# Altium PCB lab2_kulikov_buck.PcbDoc
Units mm, origin at the board's own origin, x right, y up, seen from the top; angles counter-clockwise.
Board outline 44.1 x 50 mm, 2 copper layers (Top Layer, Bottom Layer), stack 1.57 mm thick; 27 components, 17 nets, 93 pads, 5 vias.
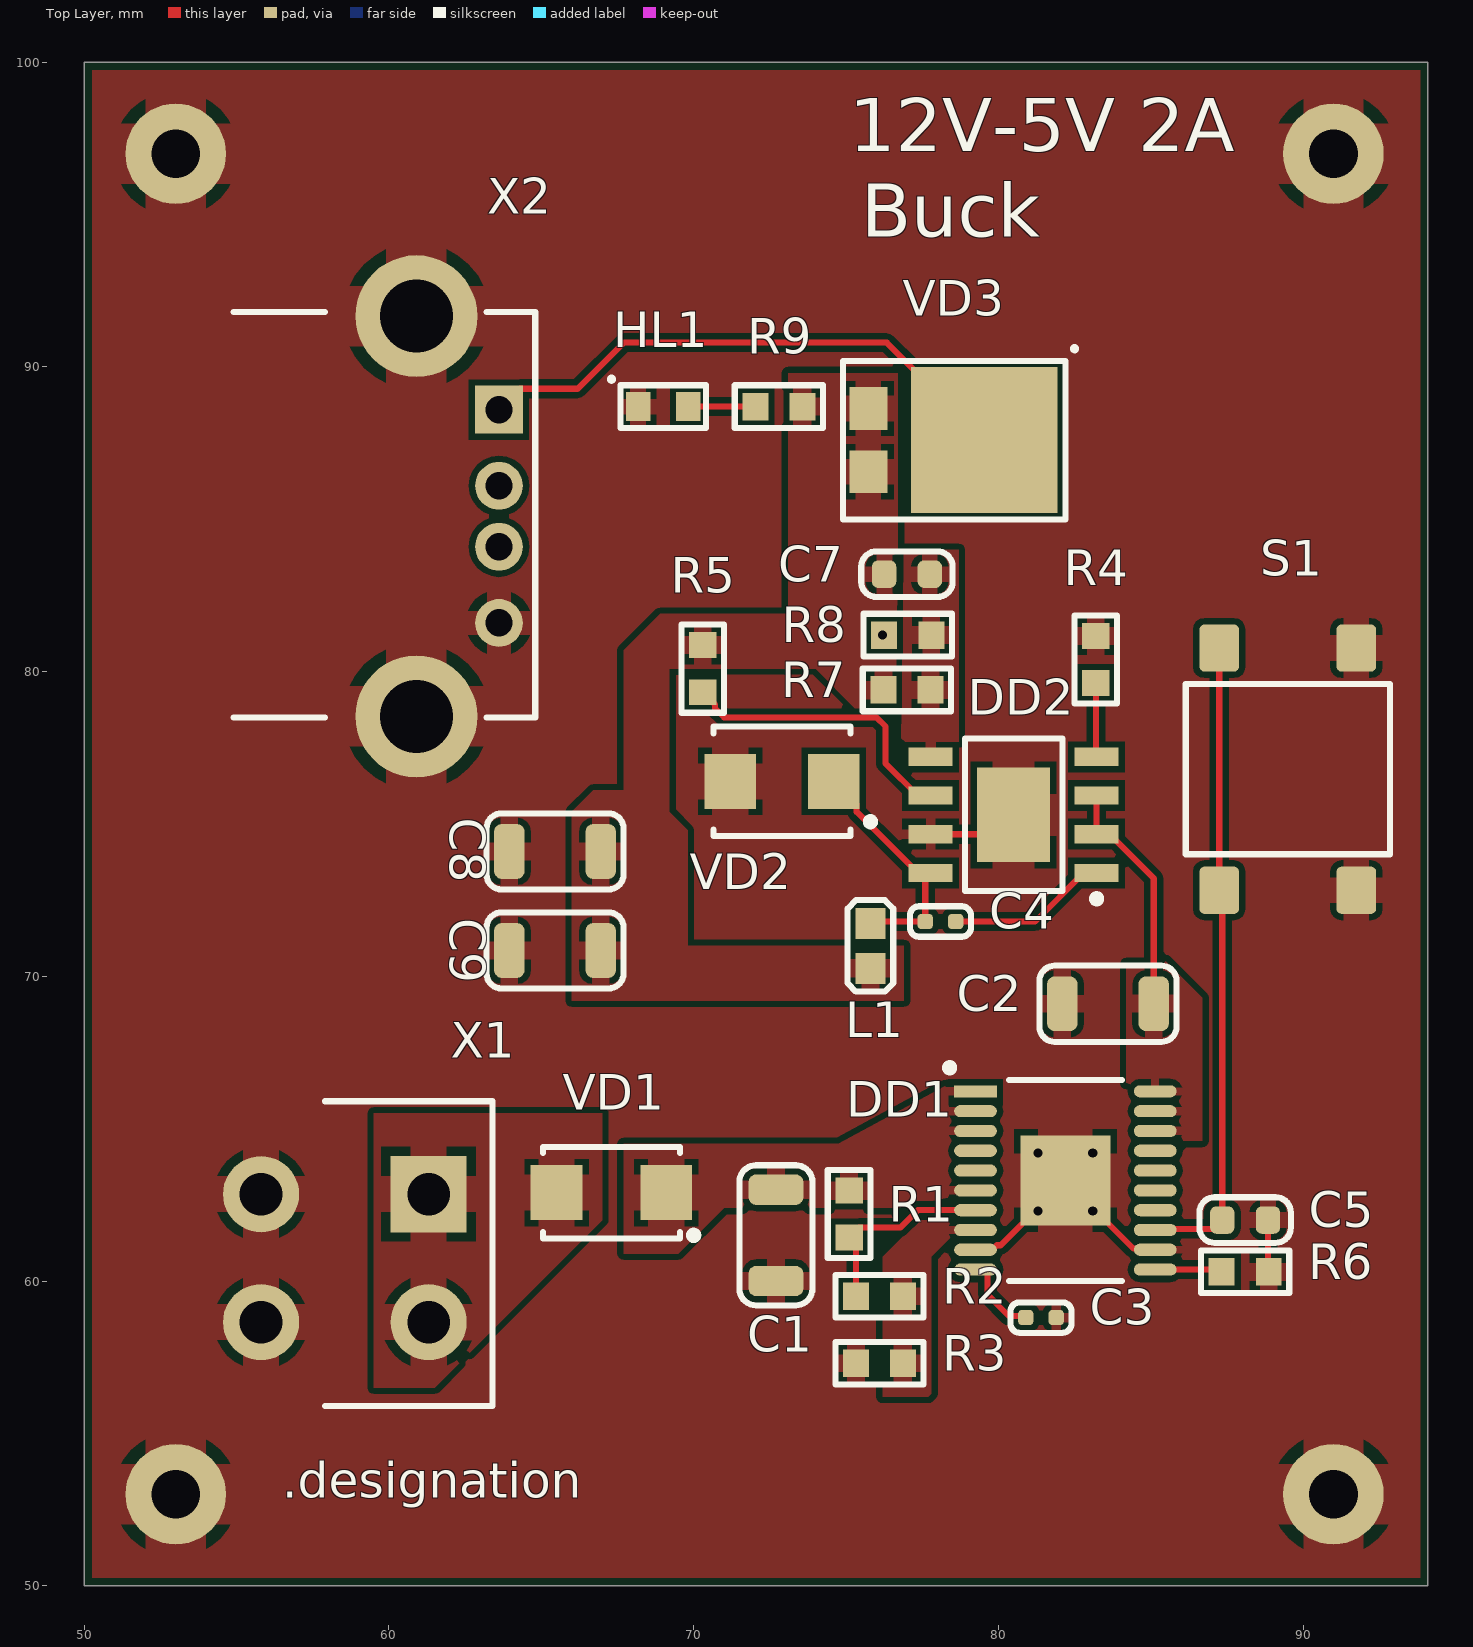
[diagram p0: Top Layer view]
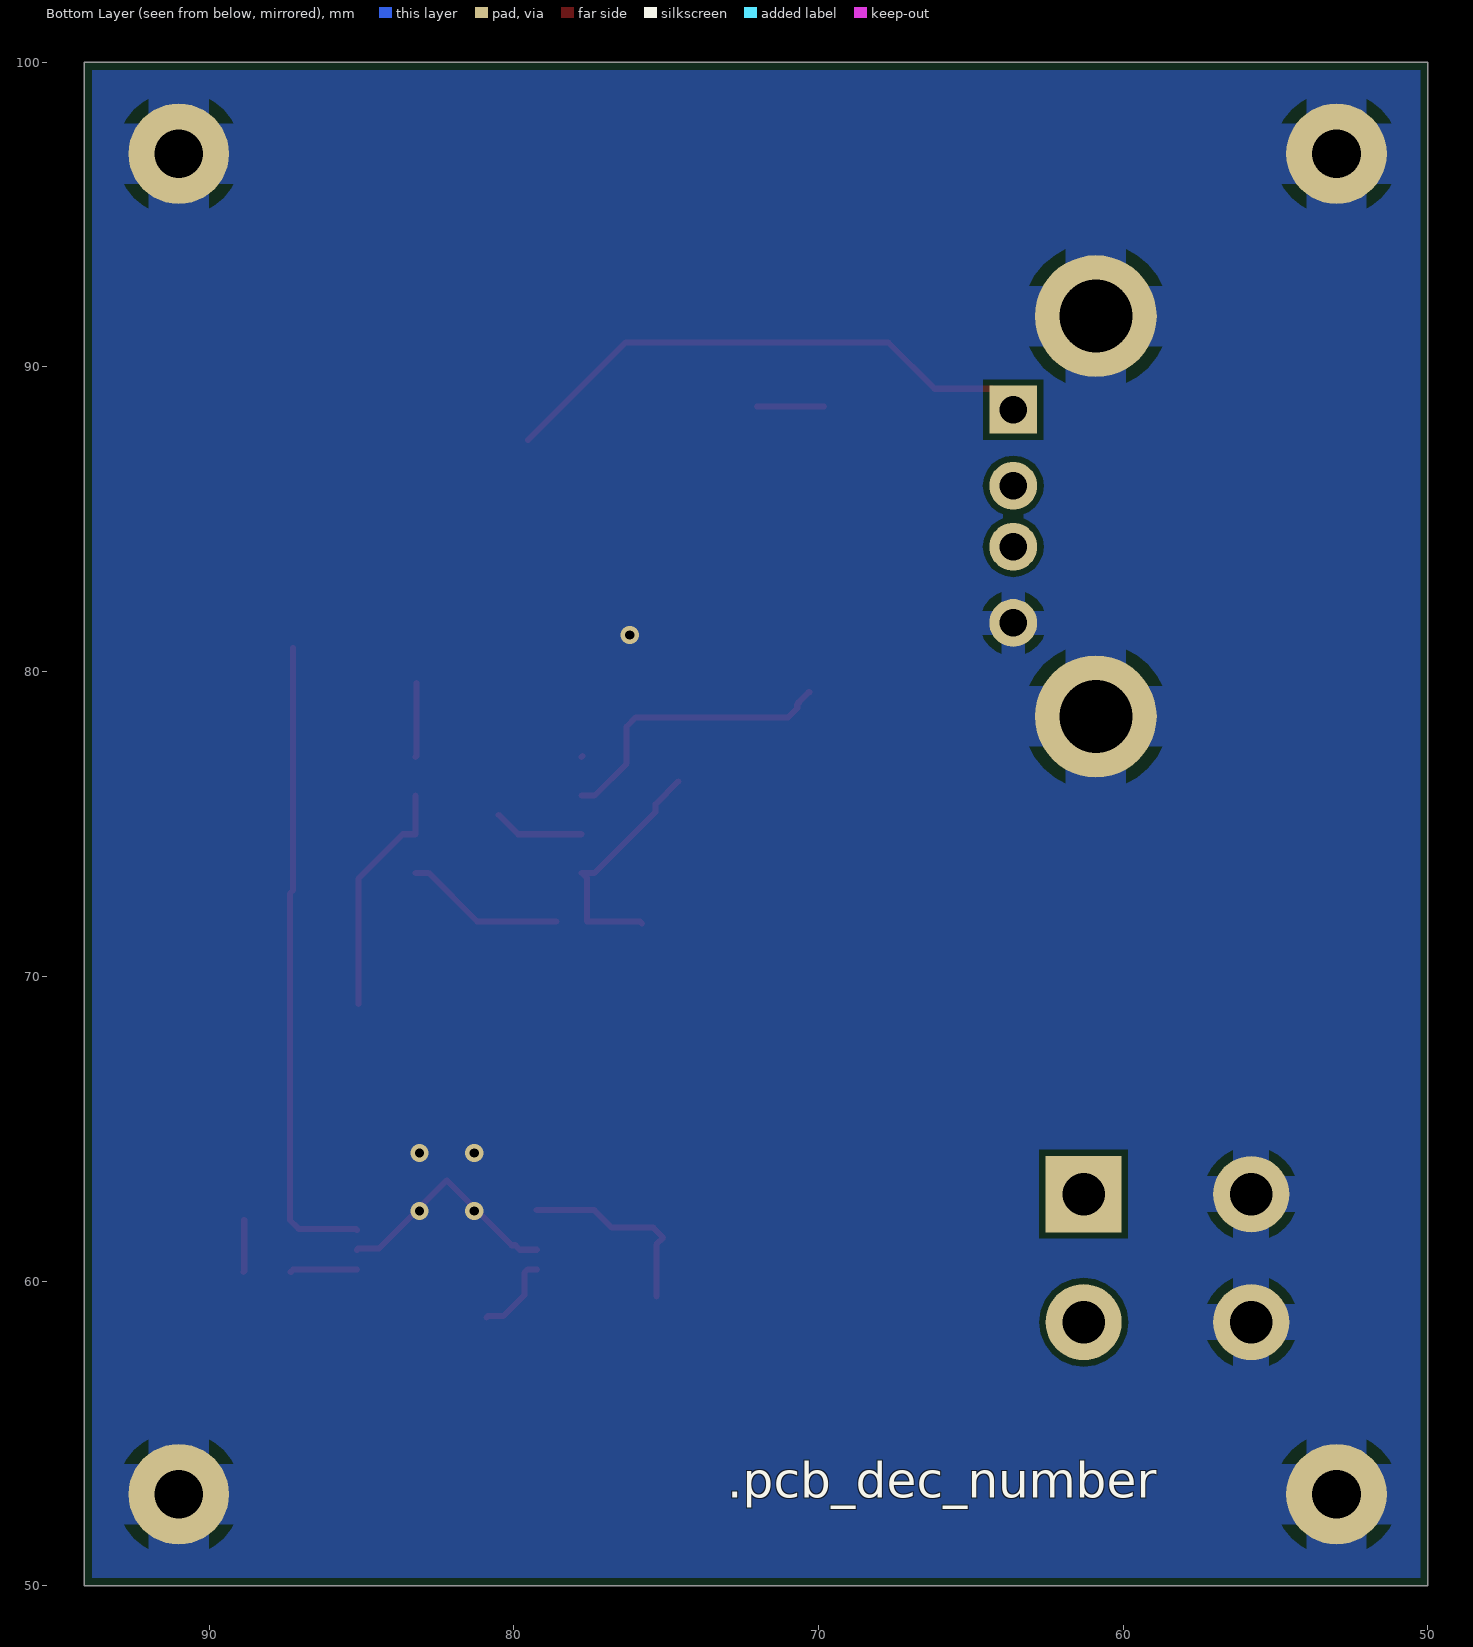
[diagram p1: Bottom Layer view, seen from below]
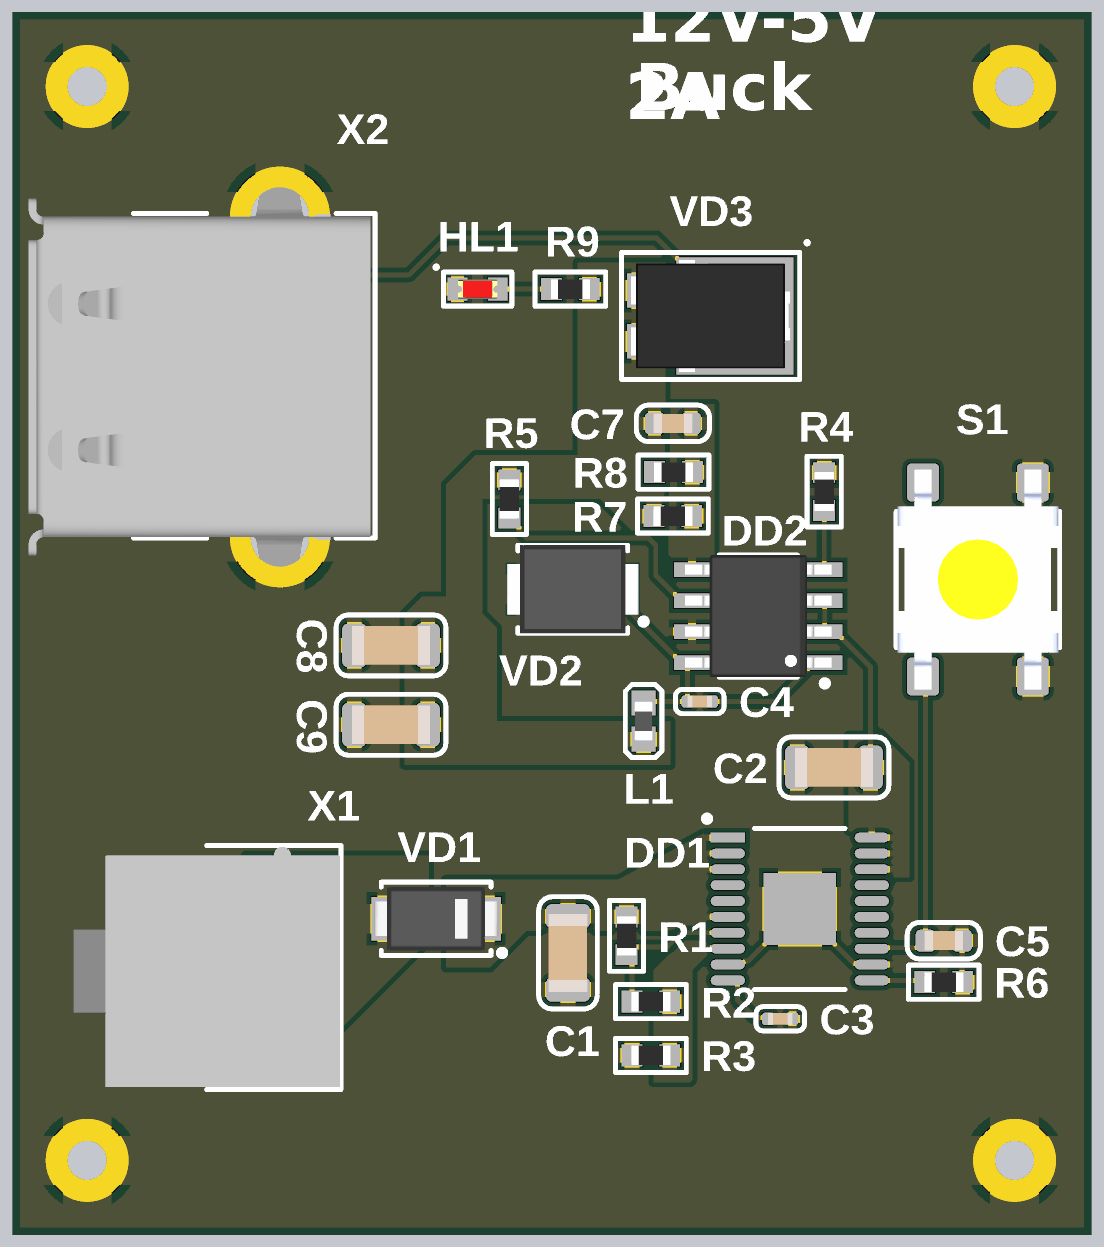
[diagram p2: 3D render of the assembled board from above, using the file's embedded part models]

## Layer stack, top to bottom
Top Solder: solder mask 0.0102, Solder Resist, Dk 3.5
Top Layer: signal copper 0.035
Core 1: core 1.5, FR4, Dk 4.6
Bottom Layer: signal copper 0.035
Bottom Solder: solder mask 0.0102, Solder Resist, Dk 3.5

## Board outline
50,50 50,100 94.1,100 94.1,50

## Design rules (kind name [scope] priority, off if disabled: settings)
AcuteAngle min_acute_angle [OnCopper] p1: minimum=3.50000000000000E+0001 checktracksonly=FALSE // Минимальный угол между примитивами топологии
BoardOutlineClearance board_outline_clearance_std [NOT (OnLayer('Bottom Overlay') OR OnLayer('Top Overlay'))] p1: gap=0.25 ignorepadtopadclearanceinfootprint=FALSE except(0: Arc-SplitContinuation Track-SplitContinuation SMDPad-SplitContinuation THPad-SplitContinuation Via-SplitContinuation Fill-SplitContinuation Poly-SplitContinuation Region-SplitContinuation Text-SplitContinuation) // Отступ элементов топологии от края фрезеруемой печатной платы
Clearance "Stitching GND" [IsStitchingVia and InNet('GND') vs (IsVia and (Not IsStitchingVia)) Or IsPad] p1: gap=0.127 ignorepadtopadclearanceinfootprint=FALSE
Clearance clearance_outer_35um_std [OnTopLayer OR OnBottomLayer] p2: gap=0.2 ignorepadtopadclearanceinfootprint=TRUE except(0.25: Arc-Hole Track-Hole SMDPad-Hole THPad-Hole Via-Hole Fill-Hole Poly-Hole Region-Hole Text-Hole) // Зазоры на внешних слоях
Clearance clearance_inner_35um_std [NOT (OnTopLayer Or OnBottomLayer)] p3: gap=0.2 ignorepadtopadclearanceinfootprint=FALSE except(0.25: Arc-Hole Track-Hole SMDPad-Hole THPad-Hole Via-Hole Fill-Hole Poly-Hole Region-Hole Text-Hole) // Зазоры на внутренних слоях
ComponentClearance [All] p1: gap=0 collisioncheckmode=3 verticalgap=0 showdistances=FALSE
DiffPairsRouting diff_pairs_routing [All] p1: maxlimit=0.127 minlimit=0.127 mostfreqgap=0.127 toplayer_minwidth=0.143 toplayer_maxwidth=0.143 toplayer_prefwidth=0.143 bottomlayer_minwidth=0.143 bottomlayer_maxwidth=0.143 bottomlayer_prefwidth=0.143 impedanceprofiledriven=TRUE impedanceprofileid={FD46899E-B5A2-4EF5-A302-5D2DB6A51F35} maxuncoupledlength=12.7 // Правила трассировки дифференциальных пар
HoleSize min_hole_size_std [IsPad] p1: absolutevalues=TRUE maxlimit=5.9 minlimit=0.6 maxpercent=80.000 minpercent=20.000 // Диаметр межслойного переходного отверстия
HoleSize min_hole_size_via_std [IsVia] p2: absolutevalues=TRUE maxlimit=5.9 minlimit=0.3 maxpercent=80.000 minpercent=20.000 // Минимальный диаметр монтажного отверстия
HoleToHoleClearance hole_to_hole_clearance_std [All] p1: gap=0.2 allowstackedmicrovias=FALSE // Минимальное расстояние между краями двух отверстий
MinimumAnnularRing min_via_ar_std [All] p1: minimumring=0.15 // Поясок площадки переходного отверстия (Annular ring VIA)
MinimumAnnularRing min_pad_ar_std [All] p2: minimumring=0.2 // Поясок монтажной контактной площадки (Annular ring PAD)
MinimumSolderMaskSliver min_solder_mask_bridge_std [All] p1: minsoldermaskwidth=0.15 // Мнимальная ширина масочного мостика
PlaneClearance plane_clearance_35um_std [All] p1: clearance=0.2 // Отступ полигона (для слоя plane) от элементов топологии
PlaneConnect [All] p1: planeconnectstyle=Relief reliefexpansion=0.5 reliefentries=4 reliefconductorwidth=0.2 reliefairgap=0.2
PolygonConnect poly_connect_to_pad<=0.3 [(AsMM(PadXSize_AllLayers)<=0.301) or (AsMM(PadYSize_AllLayers)<=0.301)] p1: thpad.connectstyle=Relief thpad.reliefconductorwidth=0.2 thpad.reliefentries=4 thpad.polygonreliefangle="90 Angle" thpad.airgapwidth=0.2 smdpad.connectstyle=Relief smdpad.reliefconductorwidth=0.2 smdpad.reliefentries=4 smdpad.polygonreliefangle="90 Angle" smdpad.airgapwidth=0.2 via.connectstyle=Direct via.reliefconductorwidth=0.254 via.reliefentries=4 via.polygonreliefangle="90 Angle" via.airgapwidth=0.254 // Правила подключения полигонов для падов от 0,3мм и меньше
PolygonConnect poly_connect_to_pad<=0.4 [(AsMM(PadXSize_AllLayers)<=0.401) or (AsMM(PadYSize_AllLayers)<=0.401)] p2: thpad.connectstyle=Relief thpad.reliefconductorwidth=0.26 thpad.reliefentries=4 thpad.polygonreliefangle="90 Angle" thpad.airgapwidth=0.2 smdpad.connectstyle=Relief smdpad.reliefconductorwidth=0.26 smdpad.reliefentries=4 smdpad.polygonreliefangle="90 Angle" smdpad.airgapwidth=0.2 via.connectstyle=Direct via.reliefconductorwidth=0.254 via.reliefentries=4 via.polygonreliefangle="90 Angle" via.airgapwidth=0.254 // Правила подключения полигонов для падов от 0,4 и меньше
PolygonConnect poly_connect_to_pad<=0.6 [(AsMM(PadXSize_AllLayers)<=0.601) or (AsMM(PadYSize_AllLayers)<=0.601)] p3: thpad.connectstyle=Relief thpad.reliefconductorwidth=0.33 thpad.reliefentries=4 thpad.polygonreliefangle="90 Angle" thpad.airgapwidth=0.2 smdpad.connectstyle=Relief smdpad.reliefconductorwidth=0.33 smdpad.reliefentries=4 smdpad.polygonreliefangle="90 Angle" smdpad.airgapwidth=0.2 via.connectstyle=Direct via.reliefconductorwidth=0.254 via.reliefentries=4 via.polygonreliefangle="90 Angle" via.airgapwidth=0.254 // Правила подключения полигонов для падов от 0,6мм и меньше
PolygonConnect poly_connect_to_pad<=0.7 [(AsMM(PadXSize_AllLayers)<=0.701) or (AsMM(PadYSize_AllLayers)<=0.701)] p4: thpad.connectstyle=Relief thpad.reliefconductorwidth=0.46 thpad.reliefentries=4 thpad.polygonreliefangle="90 Angle" thpad.airgapwidth=0.2 smdpad.connectstyle=Relief smdpad.reliefconductorwidth=0.46 smdpad.reliefentries=4 smdpad.polygonreliefangle="90 Angle" smdpad.airgapwidth=0.2 via.connectstyle=Direct via.reliefconductorwidth=0.254 via.reliefentries=4 via.polygonreliefangle="90 Angle" via.airgapwidth=0.254 // Правила подключения полигонов для падов от 0,7мм и меньше
PolygonConnect poly_connect_to_pad<=0.8 [(AsMM(PadXSize_AllLayers)<=0.8)or(AsMM(PadYSize_AllLayers)<=0.8)] p5: thpad.connectstyle=Relief thpad.reliefconductorwidth=0.53 thpad.reliefentries=4 thpad.polygonreliefangle="90 Angle" thpad.airgapwidth=0.3 smdpad.connectstyle=Relief smdpad.reliefconductorwidth=0.53 smdpad.reliefentries=4 smdpad.polygonreliefangle="90 Angle" smdpad.airgapwidth=0.2 via.connectstyle=Direct via.reliefconductorwidth=0.254 via.reliefentries=4 via.polygonreliefangle="90 Angle" via.airgapwidth=0.254 // Правила подключения полигонов для падов от 0,8мм и меньше
PolygonConnect poly_connect_to_pad<=1 [(AsMM(PadXSize_AllLayers)<=1.01)or(AsMM(PadYSize_AllLayers)<=1.01)] p6: thpad.connectstyle=Relief thpad.reliefconductorwidth=0.6 thpad.reliefentries=4 thpad.polygonreliefangle="90 Angle" thpad.airgapwidth=0.3 smdpad.connectstyle=Relief smdpad.reliefconductorwidth=0.6 smdpad.reliefentries=4 smdpad.polygonreliefangle="90 Angle" smdpad.airgapwidth=0.2 via.connectstyle=Direct via.reliefconductorwidth=0.254 via.reliefentries=4 via.polygonreliefangle="90 Angle" via.airgapwidth=0.254 // Правила подключения полигонов для падов от 1мм и меньше
PolygonConnect poly_connect_to_pad<=1.3 [(AsMM(PadXSize_AllLayers)<=1.31)or(AsMM(PadYSize_AllLayers)<=1.31)] p7: thpad.connectstyle=Relief thpad.reliefconductorwidth=0.66 thpad.reliefentries=4 thpad.polygonreliefangle="90 Angle" thpad.airgapwidth=0.3 smdpad.connectstyle=Relief smdpad.reliefconductorwidth=0.86 smdpad.reliefentries=4 smdpad.polygonreliefangle="90 Angle" smdpad.airgapwidth=0.2 via.connectstyle=Direct via.reliefconductorwidth=0.254 via.reliefentries=4 via.polygonreliefangle="90 Angle" via.airgapwidth=0.254 // Правила подключения полигонов для падов от 1,3мм и меньше
PolygonConnect poly_connect_to_pad<=1.6 [(AsMM(PadXSize_AllLayers)<=1.61)or(AsMM(PadYSize_AllLayers)<=1.61)] p8: thpad.connectstyle=Relief thpad.reliefconductorwidth=0.8 thpad.reliefentries=4 thpad.polygonreliefangle="90 Angle" thpad.airgapwidth=0.3 smdpad.connectstyle=Relief smdpad.reliefconductorwidth=1 smdpad.reliefentries=4 smdpad.polygonreliefangle="90 Angle" smdpad.airgapwidth=0.2 via.connectstyle=Direct via.reliefconductorwidth=0.254 via.reliefentries=4 via.polygonreliefangle="90 Angle" via.airgapwidth=0.254 // Правила подключения полигонов для падов от 1,6мм и меньше
PolygonConnect poly_connect_to_pad<=1.8 [(AsMM(PadXSize_AllLayers)<=1.8)or(AsMM(PadYSize_AllLayers)<=1.8)] p9: thpad.connectstyle=Relief thpad.reliefconductorwidth=1 thpad.reliefentries=4 thpad.polygonreliefangle="90 Angle" thpad.airgapwidth=0.3 smdpad.connectstyle=Relief smdpad.reliefconductorwidth=1.2 smdpad.reliefentries=4 smdpad.polygonreliefangle="90 Angle" smdpad.airgapwidth=0.2 via.connectstyle=Direct via.reliefconductorwidth=0.254 via.reliefentries=4 via.polygonreliefangle="90 Angle" via.airgapwidth=0.254 // Правила подключения полигонов для падов от 1,8мм и меньше
PolygonConnect poly_connect_to_pad<=2 [(AsMM(PadXSize_AllLayers)<=2.01)or(AsMM(PadYSize_AllLayers)<=2.01)] p10: thpad.connectstyle=Relief thpad.reliefconductorwidth=1.1 thpad.reliefentries=4 thpad.polygonreliefangle="90 Angle" thpad.airgapwidth=0.3 smdpad.connectstyle=Relief smdpad.reliefconductorwidth=1.4 smdpad.reliefentries=4 smdpad.polygonreliefangle="90 Angle" smdpad.airgapwidth=0.2 via.connectstyle=Direct via.reliefconductorwidth=0.254 via.reliefentries=4 via.polygonreliefangle="90 Angle" via.airgapwidth=0.254 // Правила подключения полигонов для падов от 2мм и меньше
PolygonConnect poly_connect_to_pad<=2.3 [(AsMM(PadXSize_AllLayers)<=2.31)or(AsMM(PadYSize_AllLayers)<=2.31)] p11: thpad.connectstyle=Relief thpad.reliefconductorwidth=1.2 thpad.reliefentries=4 thpad.polygonreliefangle="90 Angle" thpad.airgapwidth=0.3 smdpad.connectstyle=Relief smdpad.reliefconductorwidth=1.4 smdpad.reliefentries=4 smdpad.polygonreliefangle="90 Angle" smdpad.airgapwidth=0.2 via.connectstyle=Direct via.reliefconductorwidth=0.254 via.reliefentries=4 via.polygonreliefangle="90 Angle" via.airgapwidth=0.254 // Правила подключения полигонов для падов от 2,3мм и меньше
PolygonConnect poly_connect_to_pad<=2.5 [(AsMM(PadXSize_AllLayers)<=2.51)or(AsMM(PadYSize_AllLayers)<=2.51)] p12: thpad.connectstyle=Relief thpad.reliefconductorwidth=1.2 thpad.reliefentries=4 thpad.polygonreliefangle="90 Angle" thpad.airgapwidth=0.3 smdpad.connectstyle=Relief smdpad.reliefconductorwidth=1.4 smdpad.reliefentries=4 smdpad.polygonreliefangle="90 Angle" smdpad.airgapwidth=0.2 via.connectstyle=Direct via.reliefconductorwidth=0.254 via.reliefentries=4 via.polygonreliefangle="90 Angle" via.airgapwidth=0.254 // Правила подключения полигонов для падов от 2,5мм и меньше
PolygonConnect poly_connect_to_pad<=2.7 [(AsMM(PadXSize_AllLayers)<=2.71)or(AsMM(PadYSize_AllLayers)<=2.71)] p13: thpad.connectstyle=Relief thpad.reliefconductorwidth=1.4 thpad.reliefentries=4 thpad.polygonreliefangle="90 Angle" thpad.airgapwidth=0.3 smdpad.connectstyle=Relief smdpad.reliefconductorwidth=1.6 smdpad.reliefentries=4 smdpad.polygonreliefangle="90 Angle" smdpad.airgapwidth=0.2 via.connectstyle=Direct via.reliefconductorwidth=0.254 via.reliefentries=4 via.polygonreliefangle="90 Angle" via.airgapwidth=0.254 // Правила подключения полигонов для падов от 2,7мм и меньше
PolygonConnect poly_connect_to_pad<=3 [(AsMM(PadXSize_AllLayers)<=3.01)or(AsMM(PadYSize_AllLayers)<=3.01)] p14: thpad.connectstyle=Relief thpad.reliefconductorwidth=1.6 thpad.reliefentries=4 thpad.polygonreliefangle="90 Angle" thpad.airgapwidth=0.3 smdpad.connectstyle=Relief smdpad.reliefconductorwidth=1.8 smdpad.reliefentries=4 smdpad.polygonreliefangle="90 Angle" smdpad.airgapwidth=0.2 via.connectstyle=Direct via.reliefconductorwidth=0.254 via.reliefentries=4 via.polygonreliefangle="90 Angle" via.airgapwidth=0.254 // Правила подключения полигонов для падов от 3мм и меньше
PolygonConnect poly_connect_to_pad<=7 [(AsMM(PadXSize_AllLayers)<7.01)or(AsMM(PadYSize_AllLayers)<=7.01)] p15: thpad.connectstyle=Relief thpad.reliefconductorwidth=2 thpad.reliefentries=4 thpad.polygonreliefangle="90 Angle" thpad.airgapwidth=0.4 smdpad.connectstyle=Relief smdpad.reliefconductorwidth=2 smdpad.reliefentries=4 smdpad.polygonreliefangle="90 Angle" smdpad.airgapwidth=0.3 via.connectstyle=Direct via.reliefconductorwidth=0.254 via.reliefentries=4 via.polygonreliefangle="90 Angle" via.airgapwidth=0.254 // Правила подключения полигонов для падов от 7мм и меньше
PolygonConnect poly_connect_to_pad [All] p16: thpad.connectstyle=Relief thpad.reliefconductorwidth=0.25 thpad.reliefentries=4 thpad.polygonreliefangle="90 Angle" thpad.airgapwidth=0.2 smdpad.connectstyle=Relief smdpad.reliefconductorwidth=0.25 smdpad.reliefentries=4 smdpad.polygonreliefangle="90 Angle" smdpad.airgapwidth=0.2 via.connectstyle=Direct via.reliefconductorwidth=0.25 via.reliefentries=4 via.polygonreliefangle="90 Angle" via.airgapwidth=0.2 // Правила подключения полигонов общие
RoomDefinition lab2_kulikov_buck [InComponentClass('lab2_kulikov_buck')] p1: confinementstyle=ConfineIn formatcopy=TRUE lockcomponents=FALSE outline 0,0 50.8,0 50.8,25.4 0,25.4
RoutingCorners [All] p1 off: cornerstyle=45-Degree minsetback=2.5 maxsetback=2.5
RoutingVias [All] p1: holewidth=0.3 width=0.6 viastyle="Through Hole" minholewidth=0.3 minwidth=0.6 maxholewidth=5.9 maxwidth=6.4
SilkToSilkClearance silk_to_silk_clearance_std [All] p1 off: silktosilkclearance=0.15 // Отступ текста шелкографии от других примитивов шелкографии
SilkToSolderMaskClearance silk_to_solder_mask_clearance_std [IsPad] p1 off: minsilkscreentomaskgap=0.15 clearancetoexposedcopper=FALSE // Минимальное расстояние между элементами шелкографии и вскрытой медью
SolderMaskExpansion solder_mask_expansion_std [All] p1: expansion=0.05 // Припуск паяльной масски
UnRoutedNet [All] p1: checkbadconnections=TRUE
Width width_35um_std [All] p1: maxlimit=10 minlimit=0.2 preferedwidth=0.2 checkconnectedcopper=TRUE // Ширина проводников (общая)
19 further rules are at their usual default settings.

## Components (designator, comment, footprint, x,y, rotation, side; value= is the part's Value field where it differs from the comment)
C1 "1 мк" C1206 72.7,61.5 r270 top
C2 "4,7 мк" C1206 83.6,69.1 r180 top
C3 "680" C0402 81.4,58.8 r0 top
C4 "0,1 мк" C0402 78.1,71.8 r180 top
C5 "0,1 мк" C0603 88.1,62 r0 top
C7 "390 п" C0603 77,83.2 r0 top
C8 "100 мк" C1206 65.45,74.1 r180 top
C9 "100 мк" C1206 65.45,70.85 r180 top
DD1 "TPS16630PWPR" HTSSOP-20 82.2,63.3 r0 top
DD2 "LMR16020" SOIC127P600X170_HS-9N 80.5,75.3 r180 top
HL1 "TLMS1000-GS08" HL0603 69,88.7 r0 top
L1 "BLM18KG221SH1D" BLM-2-0603 75.8,71 r270 top
R1 "240 к" R0603 75.1,62.2 r270 top
R2 "12 к" R0603 76.1,59.5 r180 top
R3 "20 к" R0603 76.1,57.3 r0 top
R4 "47 к" R0603 83.2,80.4 r270 top
R5 "100 к" R0603 70.3,80.1 r90 top
R6 "9,1 к" R0603 88.1,60.3 r180 top
R7 "68 к" R0603 77,79.4 r180 top
R8 "12 к" R0603 77.025,81.2 r180 top
R9 "220" R0603 72.8,88.7 r0 top
S1 "B3S-1002" B3S-1002 89.5,76.8 r270 top
VD1 "SL13-E3/5AT" DO-214AC-510X270X229 67.3,62.9 r180 top
VD2 "SS36-E3/57T" DO-214AB 72.9,76.4 r180 top
VD3 "SS3P4L-M3/87A" TO-277A 78.5,87.6 r0 top
X1 "4-1775099-0" 4-1775099-0 57.9,60.9 r270 top
X2 "292303-5" 292303-5 57.6,85.1 r270 top

## Footprints (in the part's own frame and the unit in brackets; to place one, negate y for a bottom-side part, rotate by r counter-clockwise, add the part's x,y. Pads: shape width x height; smd on the part's side, far side on the other; paste and mask are expansions set on the pad)
4-1775099-0 [mm]
  rect 2.5x2.5 hole 1.4: 1(-1.95,3.4)
  round 2.5 hole 1.4: 2(2.25,3.4) 3(-1.95,-2.1) 4(2.25,-2.1)
  silkscreen extent -5,0 5,5.5, body extent -4.95,-5.45 4.9,5.45, height 12.8
292303-5 [mm]
  rect 1.57x1.57 hole 0.9: 1(-3.5,6.01)
  round 1.57 hole 0.9: 2(-1,6.01) 3(1,6.01) 4(3.5,6.01)
  round 4 hole 2.4: TP1(-6.57,3.3) TP1(6.57,3.3)
  silkscreen extent -6.7,-2.7 6.6,7.2, body extent -8.12,-7 8.12,7, height 7.77
B3S-1002 [mm]
  rrect25% 1.55x1.3 smd: 1(-3.975,2.25) 1(3.975,2.25) 2(-3.975,-2.25) 2(3.975,-2.25)
  silkscreen extent -2.79,-3.35 2.79,3.35, body extent -4.51,-3.3 4.51,3.3, height 4.3
BLM-2-0603 [mm] "Chip Inductor, 2-Leads, Body 1,60x0,80mm, IPC Medium Density"
  rect 1.02x0.98 smd: 1(-0.74,0) 2(0.74,0)
  silkscreen extent -1.5,-0.75 1.5,0.75, body extent -0.8,-0.37 0.8,0.38, height 0.8
C0402 [mm] "Chip Capacitor, 2-Leads, Body 1,00x0,50mm, IPC Medium Density"
  rrect50% 0.5x0.5 smd: 1(-0.5,0) 2(0.5,0)
  silkscreen extent -1,-0.5 1,0.5, body extent -0.5,-0.25 0.5,0.25, height 0.5
C0603 [mm] "Chip Capacitor, 2-Leads, Body 1,60x0,80mm, IPC Medium Density"
  rrect50% 0.8x0.9 smd: 1(-0.75,0) 2(0.75,0)
  silkscreen extent -1.5,-0.75 1.5,0.75, body extent -0.8,-0.4 0.8,0.4, height 0.8
C1206 [mm] "Chip Capacitor, 2-Leads, Body 3,20x1,60mm, IPC Medium Density"
  rrect50% 1x1.8 smd: 1(-1.5,0) 2(1.5,0)
  silkscreen extent -2.3,-1.2 2.3,1.2, body extent -1.6,-0.8 1.6,0.8, height 0.78
DO-214AB [mm] "Molded Diode, 2-Leads, Body 6,86x5,91mm, IPC Medium Density"
  rect 1.7x1.8 smd: 1(-1.7,0) 2(1.7,0)
  silkscreen extent -3.03,-1.8 2.25,1.8, body extent -2.7,-1.81 2.7,1.81, height 2.43
DO-214AC-510X270X229 [mm] "Molded Diode, 2-Leads, Body 5,10x2,70mm, IPC Medium Density"
  rect 1.7x1.8 smd: 1(-1.8,0) 2(1.8,0)
  silkscreen extent -2.83,-1.5 2.25,1.52, body extent -2.55,-1.3 2.55,1.3, height 2.26
HL0603 [mm] "Chip Diode, 2-Leads, Body 1,60x0,80mm, IPC Medium Density"
  rect 0.8x0.95 smd: 1(-0.825,0) 2(0.825,0)
  silkscreen extent -1.75,-0.7 1.4,0.95, body extent -0.81,-0.4 0.81,0.4, height 0.6
HTSSOP-20 [mm] "TSOP, 20-Leads, Body 6,50x4,40mm, Pitch 0,65mm, Thermal Pad 2,96x2,96mm, IPC Medium Density"
  rect 2.96x2.96 smd: 0(0,0)
  rect 1.4x0.4 smd: 1(-2.95,2.925)
  oval 1.4x0.4 smd: 2(-2.95,2.275) 3(-2.95,1.625) 4(-2.95,0.975) 5(-2.95,0.325) 6(-2.95,-0.325) 7(-2.95,-0.975) 8(-2.95,-1.625) 9(-2.95,-2.275) 10(-2.95,-2.925) 11(2.95,-2.925) 12(2.95,-2.275) 13(2.95,-1.625) 14(2.95,-0.975) 15(2.95,-0.325) 16(2.95,0.325) 17(2.95,0.975) 18(2.95,1.625) 19(2.95,2.275) 20(2.95,2.925)
  silkscreen extent -3.92,-3.3 1.85,3.82, body extent -2.25,-3.3 2.25,3.3, height 1.2
R0603 [mm] "Chip Resistor, 2-Leads, Body 1,60x0,80mm, IPC Medium Density"
  rect 0.85x0.9 smd: 1(-0.775,0) 2(0.775,0)
  silkscreen extent -1.45,-0.7 1.45,0.7, body extent -0.8,-0.4 0.8,0.4, height 0.45
SOIC127P600X170_HS-9N [mm] "SOIC, 8-Leads, Body 4,90x3,90mm, Pitch 1,27mm, Thermal Pad 3,10x2,40mm, IPC Medium Density"
  rect 1.45x0.6 smd: 1(-2.725,1.905) 2(-2.725,0.635) 3(-2.725,-0.635) 4(-2.725,-1.905) 5(2.725,-1.905) 6(2.725,-0.635) 7(2.725,0.635) 8(2.725,1.905)
  rect 2.4x3.1 smd: 9(0,0)
  silkscreen extent -2.85,-2.5 1.6,2.88, body extent -3,-2.5 3,2.5, height 1.7
TO-277A [mm] "DFN, 3-Leads, Body 4,30x6,10mm, Pitch 3,81mm, IPC Medium Density"
  rect 4.8x4.8 smd: 1(1.04,0)
  rect 1.25x1.4 smd: 2(-2.765,-1.04) 2(-2.765,1.04)
  silkscreen extent -3.6,-2.6 4.05,3.05, body extent -3.21,-2.3 3.29,2.3, height 1.05

## Part data
C1: library part c0098, "=Описание", HelpURL=https://www.yageo.com/upload/media/product/productsearch/datasheet/mlcc/UPY-NP0X7R_MV_100-to-630V_22.pdf, ID=c0098, Корпус=1206, Наименование=CC1206KKX7R0BB105, Напряжение="100 В", Номинал="1 мк", Номинальное напряжение="100 В", Описание="Конденсатор керамический чип 1206 1 мкФ 100 В ±10 %", Отклонение="±10 %", Производитель="YAGEO Corp.", Рабочие температуры="от –55 °С до +125 °С", Температурный коэффициент емкости=X7R, Фамилия=Ларионов
C2 C8 C9: library part c0105, "=Описание", Корпус=1206, Отклонение="±10 %", Фамилия=Куликов
  C2: HelpURL=https://www.murata.com/en-global/search/productsearch?cate=cgCapacitors&partno=GRM31CR71E475KA88L, ID=c0122, Наименование=GRM31CR71E475KA88L, Напряжение="25 В", Номинал="4,7 мк", Номинальное напряжение="25 В", Описание="Конденсатор чип 1206 4,7 мкФ 25 В ±10 %", Производитель=MuRata, Рабочие температуры="от –55 °С до +125 °С", Температурный коэффициент емкости=X7R
  C8 C9: HelpURL=https://product.tdk.com/info/en/catalog/datasheets/mlcc_commercial_general_en.pdf, ID=c0121, Наименование=C3216X5R1A107M160AC, Напряжение="10 В", Номинал="100 мк", Номинальное напряжение="10 В", Описание="Конденсатор чип 1206 100мкФ 10 В ±10 %", Производитель=TDK, Рабочие температуры="от –55 °С до +85 °С", Температурный коэффициент емкости=X5R
C3: library part c0004, "=Описание", HelpURL=https://www.yageo.com/upload/media/product/productsearch/datasheet/mlcc/UPY-GP_NP0_16V-to-50V_18.pdf, ID=c0122, Корпус=0402, Наименование=CC0402JRNPO9BN681, Напряжение="50 В", Номинал=680, Номинальное напряжение="50 В", Описание="Конденсатор чип 0402 680 пФ 50 В ±1 %", Отклонение="±5 %", Производитель=YAGEO, Рабочие температуры="от –55 °С до +125 °С", Температурный коэффициент емкости=C0G, Фамилия=Куликов
C4: library part c0006, "=Описание", HelpURL=https://www.murata.com/en-eu/products/productdetail?partno=GRM155R71A104KA01%23, ID=c0119, Корпус=0402, Наименование=GRM155R71A104KA01D, Напряжение="10 В", Номинал="0,1 мк", Номинальное напряжение="10 В", Описание="Конденсатор чип 0402 100 нФ 10 В ±10 %", Отклонение="±10 %", Производитель=MuRata, Рабочие температуры="от –55 °С до +125 °С", Температурный коэффициент емкости=C0G, Фамилия=Куликов
C5: library part c0018, "=Описание", HelpURL=https://www.yageo.com/upload/media/product/productsearch/datasheet/mlcc/UPY-NP0X7R_MV_100-to-630V_22.pdf, ID=c0018, Корпус=0603, Наименование=CC0603KRX7R0BB104, Напряжение="100 В", Номинал="0,1 мк", Номинальное напряжение="100 В", Описание="Конденсатор чип 0603 0,1 мкФ 100 В ±10 %", Отклонение="±10 %", Производитель="YAGEO Corp.", Рабочие температуры="от -55 °С до +125 °С", Фамилия=Ларионов
C7: library part c0019, "=Описание", HelpURL=https://www.yageo.com/upload/media/product/products/datasheet/mlcc/UPY-GPHC_X7R_6.3V-to-50V_20.pdf, ID=c0120, Корпус=0603, Наименование=GRM1885C1H391JA01D, Напряжение="50 В", Номинал="390 п", Номинальное напряжение="50 В", Описание="Конденсатор чип 0603 390 пФ 50 В ±10 %", Отклонение="±10 %", Производитель=MuRata, Рабочие температуры="от –55 °С до +125 °С", Температурный коэффициент емкости=X7R, Фамилия=Куликов
DD1: library part dd0002, "=Описание", HelpURL=https://www.ti.com/product/TPS1663, ID=dd0002, Корпус=HTSSOP-20, Максимальное напряжение="67 В", Наименование=TPS16630PWPR, Напряжение="от 4,5 В до 60 В", Описание="Защитная микросхема eFuse 60 В и 6 А", Производитель="Texas Instruments", Рабочие температуры="от -40 °С до +125 °С", Ток="от 0,6 А до 6 А", Фамилия=Жернаков
DD2: library part Component_1
HL1: library part hl0001, "=Описание", HelpURL=https://www.vishay.com/leds/list/product-83172/, ID=hl0001, Корпус=0603, Наименование=TLMS1000-GS08, Номинальная длина волны="628 нм", Номинальная сила света="4 мкд", Номинальное падение напряжения="1,8 В", Номинальный прямой ток="15 мА", Описание="Светодиод чип 0603 красный", Производитель="Vishay Intertechnology, Inc.", Рабочие температуры="от –40 °С до +100 °С", Рассеиваемая мощность="40 мВт", Фамилия=Ларионов, Цвет=Red
L1: library part l0001, "=Описание", HelpURL=https://www.murata.com/en-global/products/productdetail?partno=BLM18KG221SH1%23, ID=l0001, Корпус=0603, Наименование=BLM18KG221SH1D, Описание="Ферритовая бусина 220 Ом ±25 %", Отклонение, 100 МГц="±25 %", Производитель="Murata Manufacturing Co., Ltd.", Рабочие температуры="от –55 °С до +125 °С", Сопротивление, 100 МГц="220 Ом", Сопротивление при постоянном токе="0,05 Ом", Фамилия=Ларионов
R1: library part r0108, "=Описание", HelpURL=https://www.yageo.com/upload/media/product/productsearch/datasheet/rchip/PYu-RC_Group_51_RoHS_L_11.pdf, ID=r0108, Корпус=0603, Наименование=RC0603FR-07240KL, Номинал="240 к", Номинальное напряжение="75 В", Номинальный ток="1 А", Описание="Резистор чип 0603 240 кОм ±1 % 0,1 Вт", Отклонение="±1 %", Производитель="YAGEO Corp.", Рабочие температуры="от –55 °С до +155 °С", Фамилия=Паньков
R2: library part r0064, "=Описание", HelpURL=https://www.yageo.com/upload/media/product/productsearch/datasheet/rchip/PYu-AC_51_RoHS_L_7.pdf, ID=r0064, Корпус=0603, Наименование=AC0603FR-1012KL, Номинал="12 к", Номинальное напряжение="75 В", Номинальный ток="1 А", Описание="Резистор чип 0603 12 кОм ±1 % 0,1 Вт", Отклонение="±1 %", Производитель="YAGEO Corp.", Рабочие температуры="от –55 °С до +155 °С", Фамилия=Соколов
R3: library part r0070, "=Описание", HelpURL=https://www.yageo.com/upload/media/product/productsearch/datasheet/rchip/PYu-RC_Group_51_RoHS_L_11.pdf, ID=r0070, Корпус=0603, Наименование=RC0603FR-0720KL, Номинал="20 к", Номинальное напряжение="75 В", Номинальный ток="1 А", Описание="Резистор чип 0603 20 кОм ±1 % 0,1 Вт", Отклонение="±1 %", Производитель="YAGEO Corp.", Рабочие температуры="от –55 °С до +155 °С", Фамилия=Паньков
R4: library part r0083, "=Описание", HelpURL=https://www.yageo.com/upload/media/product/productsearch/datasheet/rchip/PYu-RC_Group_51_RoHS_L_11.pdf, ID=r0083, Корпус=0603, Наименование=RC0603FR-0747KL, Номинал="47 к", Номинальное напряжение="75 В", Номинальный ток="1 А", Описание="Резистор чип 0603 47 кОм ±1 % 0,1 Вт", Отклонение="±1 %", Производитель="YAGEO Corp.", Рабочие температуры="от –55 °С до +155 °С", Фамилия=Паньков
R5: library part r0023, "=Описание", HelpURL=https://www.yageo.com/upload/media/product/productsearch/datasheet/rchip/PYu-RC_Group_51_RoHS_L_11.pdf, ID=r0023, Корпус=0603, Наименование=RC0603FR-07100KL, Номинал="100 к", Номинальное напряжение="75 В", Номинальный ток="1 А", Описание="Резистор чип 0603 100 кОм ±1 % 0,2 Вт", Отклонение="±1 %", Производитель="YAGEO Corp.", Рабочие температуры="от -55 °С до +155 °С", Фамилия=Водорезов
R6: library part r0059, "=Описание", HelpURL=https://www.yageo.com/upload/media/product/productsearch/datasheet/rchip/PYu-RC_Group_51_RoHS_L_11.pdf, ID=r0059, Корпус=0603, Наименование=RC0603FR-079K1L, Номинал="9,1 к", Номинальное напряжение="75 В", Номинальный ток="1 А", Описание="Резистор чип 0603 9,1 кОм ±1 % 0,1 Вт", Отклонение="±1 %", Производитель="YAGEO Corp.", Рабочие температуры="от –55 °С до +155 °С", Фамилия=Паньков
R7: library part r0089, "=Описание", HelpURL=https://www.yageo.com/upload/media/product/productsearch/datasheet/rchip/PYu-RC_Group_51_RoHS_L_11.pdf, ID=r0089, Корпус=0603, Наименование=RC0603FR-0768KL, Номинал="68 к", Номинальное напряжение="75 В", Номинальный ток="1 А", Описание="Резистор чип 0603 68 кОм ±1 % 0,1 Вт", Отклонение="±1 %", Производитель="YAGEO Corp.", Рабочие температуры="от –55 °С до +155 °С", Фамилия=Паньков
R8: library part r0063, "=Описание", HelpURL=https://www.yageo.com/upload/media/product/productsearch/datasheet/rchip/PYu-RC_Group_51_RoHS_L_11.pdf, ID=r0063, Корпус=0603, Наименование=RC0603FR-0712KL, Номинал="12 к", Номинальное напряжение="75 В", Номинальный ток="1 А", Описание="Резистор чип 0603 12 кОм ±1 % 0,1 Вт", Отклонение="±1 %", Производитель="YAGEO Corp.", Рабочие температуры="от –55 °С до +155 °С", Фамилия=Паньков
R9: library part r0009, "=Описание", HelpURL=https://www.yageo.com/upload/media/product/productsearch/datasheet/rchip/PYu-RC_Group_51_RoHS_L_11.pdf, ID=r0009, Корпус=0603, Наименование=RC0603FR-07220RL, Номинал=220, Номинальное напряжение="75 В", Номинальный ток="1 А", Описание="Резистор чип 0603 220 Ом ±1 % 0,1 Вт", Отклонение="±1 %", Производитель="YAGEO Corp.", Рабочие температуры="от -55 °С до +155 °С", Фамилия=Ларионов
S1: library part s0003, "=Описание", HelpURL=https://components.omron.com/product-detail?partId=468, ID=s0003, Количество контактов=4, Корпус="6,00 x 6,60 x 4,30", Наименование=B3S-1002, Описание="Тактовая кнопка поверхностного монтажа", Производитель="OMRON Corporation", Промывка=Разрешена, Рабочие температуры="от –25 °С до +70 °С", Сопротивление контакта="100 мОм", Ток нагрузки="50 мА @ 24 В", Фамилия=Засецкий
VD1 VD3: library part vd0003, "=Описание", ID=vd0003, Производитель="Vishay Intertechnology, Inc.", Фамилия=Ларионов
  VD1: HelpURL=https://www.vishay.com/product?docid=88740, Корпус=DO-214AC, Максимальное обратное напряжение="30 В", Максимальное прямое напряжение="0,445 В", Максимальный прямой ток="1,5 А", Наименование=SL13-E3/5AT, Описание="Диод Шоттки 30 В 1,5 А", Рабочие температуры="от –55 °С до +125 °С"
  VD3: HelpURL=https://www.vishay.com/diodes/list/product-88986/, Импульсное обратное напряжение="40 В", Корпус=TO-277A, Макс допустимый средний прямой ток="3 А", Наименование=SS3P4L-M3/87A, Описание="Диод Шоттки 40 В 3 А", Пиковое прямое напряжение="0,47 В", Рабочие температуры="от –55 °С до +150 °С"
VD2: library part vd0004, "=Описание", HelpURL=https://www.vishay.com/product?docid=88751, ID=vd0004, Импульсное обратное напряжение="60 В", Корпус=DO-214AB, Макс допустимый средний прямой ток="3 А", Наименование=SS36-E3/57T, Описание="Диод Шоттки 60 В 3 А", Пиковое прямое напряжение="0,75 В", Производитель="Vishay Intertechnology, Inc.", Рабочие температуры="от –55 °С до +150 °С", Фамилия=Жернаков
X1: library part x0004, "=Описание", Contact_1=+12V, Contact_2=+12V, Contact_3=GND, Contact_4=GND, HelpURL=https://www.te.com/usa-en/product-4-1775099-0.html, ID=x0004, Наименование=4-1775099-0, Описание="ATX Power 4 pin гнездо прямой", Производитель="TE Connectivity", Фамилия=Ларионов
X2: library part x0003, "=Описание", Contact_1=+5V, Contact_2=NC, Contact_3=NC, Contact_4=GND, HelpURL=https://www.te.com/usa-en/product-292303-5.html, ID=x0003, Наименование=292303-5, Описание="USB 2.0 Type A гнездо", Производитель="TE Connectivity", Фамилия=Ларионов

## Free pads (board coordinates)
  round 3.3 hole 1.6: 1(53,53) 1(53,97) 1(91,53) 1(91,97)

## Via types
v1: diameter 0.6, hole 0.3, Top Layer to Bottom Layer, 5 vias

## Nets (pads, with @x,y where several pads share a name; then routed paths per layer and width w, separated by ;. In a path a pad name is that pad's centre, name@x,y a point inside that pad or via, vN(x,y) a via of type N, cw(c..) or ccw(c..) an arc to the next point about the centre after c; other vN are vias at no path point)
+5V: C7.1 C8.1 C9.1 L1.2 R5.2 R7.2 R9.2 VD3.2
+12V: VD1.2 X1.1 X1.2
+12V_IN: C1.1 DD1.1 DD1.2 DD1.3 DD1.6 R1.1 VD1.1
+12V_IN_PROT: C2.1 DD1.18 DD1.19 DD1.20 DD2.2 DD2.3 | length 7.9
  Top Layer w0.2: DD2.3 DD2.2 83.65,74.665 85.1,73.215 C2.1
BOOT: C4.1 DD2.1 | length 5.3
  Top Layer w0.2: C4.1 81.205,71.8 82.8,73.395 DD2.1
FB: C7.2 DD2.5 R7.1 R8.1 | length 0
  Top Layer w0.2: DD2.5@77.75,77.23 DD2.5
GND: C1.2 C2.2 C3.2 C5.2 C8.2 C9.2 DD1.0 DD1.9 DD1.12 DD2.7 DD2.9 HL1.1 pad.1 R3.1 R4.1 R6.1 R8.2 S1.1 VD2.2 X1.3 X1.4 X2.4 X2.TP1 | length 12.5
  Top Layer w0.2: DD2.7 79.865,74.665 DD2.9 ; DD1.9 79.804,61.025 79.954,61.175 80.075,61.175 DD1.0 84.437,61.063 85.112,61.063 DD1.12 ; C5.2 88.85,60.325 R6.1
  other v1: 81.3,62.3 83.1,62.3 81.3,64.2 83.1,64.2 76.2,81.2
NetC3_1: C3.1 DD1.10 | length 2.7
  Top Layer w0.2: DD1.10 79.558,60.375 79.65,60.283 79.65,59.55 80.35,58.85 80.85,58.85 C3.1
NetC5_1: C5.1 DD1.13 S1.2 | length 21.2
  Top Layer w0.2: DD1.13 85.188,61.713 87.063,61.713 C5.1 87.35,72.725 87.25,72.825 S1.2@87.25,80.775
NetDD1_7: DD1.7 R1.2 R2.2 | length 6.5
  Top Layer w0.2: R2.2 75.325,61.2 R1.2 75.425,61.75 76.785,61.75 77.36,62.325 DD1.7
NetDD1_8: DD1.8 R2.1 R3.2
NetDD1_11: DD1.11 R6.2 | length 2.2
  Top Layer w0.2: DD1.11 87.25,60.375 R6.2
NetDD2_4: DD2.4 R4.2 | length 2.4
  Top Layer w0.2: R4.2 83.2,77.23 DD2.4
NetDD2_6: DD2.6 R5.1 | length 9.7
  Top Layer w0.2: R5.1 70.325,79.325 70.65,79 70.65,78.975 70.7,78.925 70.7,78.8 71,78.5 76,78.5 76.3,78.2 76.3,76.985 77.35,75.935 DD2.6
NetHL1_2: HL1.2 R9.1 | length 2.2
  Top Layer w0.2: HL1.2 R9.1
NetVD3_1: VD3.1 X2.1 | length 18.2
  Top Layer w0.2: X2.1 64.295,89.285 66.19,89.285 67.705,90.8 76.34,90.8 VD3.1
SW: C4.2 DD2.8 L1.1 VD2.1 | length 8.1
  Top Layer w0.2: VD2.1 75.35,75.65 75.35,75.395 77.35,73.395 DD2.8 77.6,73.22 C4.2 75.86,71.8 L1.1
pads on no net: DD1.4 DD1.5 DD1.14 DD1.15 DD1.16 DD1.17 X2.2 X2.3

## Polygon pours and split planes (outlines as drawn)
GND on Top Layer (solid, pour order 68): 46.6,102.9 96.8,102.9 98,101.7 98,47.2 47.3,47.2 46.9,46.8
+12V on Top Layer (solid, pour order 38): 59.5,65.5 59.5,56.5 61.5,56.5 67,62 67,65.5
+5V on Top Layer (solid, pour order 36): 76.9,71 76.9,69.2 69.8,69.2 69.8,71
+5V on Top Layer (solid, pour order 34): 66,69.2 69.8,69.2 69.8,74.8 69.2,75.4 69.2,80.1 74,80.1 75.3,78.8 76.7,78.8 76.7,89.8 73.1,89.8 73.1,81.9 68.9,81.9 67.7,80.7 67.7,76.1 66.7,76.1 66,75.4
FB on Top Layer (solid, pour order 30): 76.8,76.6 78.7,76.6 78.7,84 76.9,84
+12V_IN_PROT on Top Layer (solid, pour order 22): 84.2,64.6 86.7,64.6 86.7,69.3 85.5,70.5 85.4,70.4 84.2,70.4
NetDD1_8 on Top Layer (solid, pour order 20): 76.2,56.2 77.7,56.2 77.8,56.3 77.8,60.8 78.4,61.4 79,61.4 79,62 77.4,62 76.2,60.8
+12V_IN on Top Layer (solid, pour order 16): 67.7,64.5 67.7,60.9 69.5,60.9 71,62.4 76.72,62.4 78.7,62.8 78.9,63.1 79,63.2 79,63.9 79,64.2 79,66.8 78.976,66.791 74.746,64.5
no net on Top Layer (solid, pour order 10): 59.2,64.7
no net on Top Layer (solid, pour order 6): 59,65
GND on Bottom Layer (solid, pour order 66): 47.8,102.4 96.6,102.4 96.6,46.7 95.5,45.6 94.7,46.4 47,46.4

## Silkscreen, mask and mechanical layers (free items; w line width, h text height)
Top Overlay:
  text "12V-5V 2A" at 75.1,96.5 h3
  text "Buck" at 75.5,93.7 h3
  text ".designation" at 56.5,52.5 h2
Bottom Overlay:
  text ".pcb_dec_number" at 73,52.5 h2
Board:
  the board outline again, w0.1
Assembly Notes (Mech5):
  text "'.title'" at 50,47.5 h2
  text "'.project'_'.pcb_dec_number'['.Pcb_File_Name_No_Path']" at 50,45 h2